# EAGLE board EC-TDS-PPM1_1 (EAGLE 7.5.0)
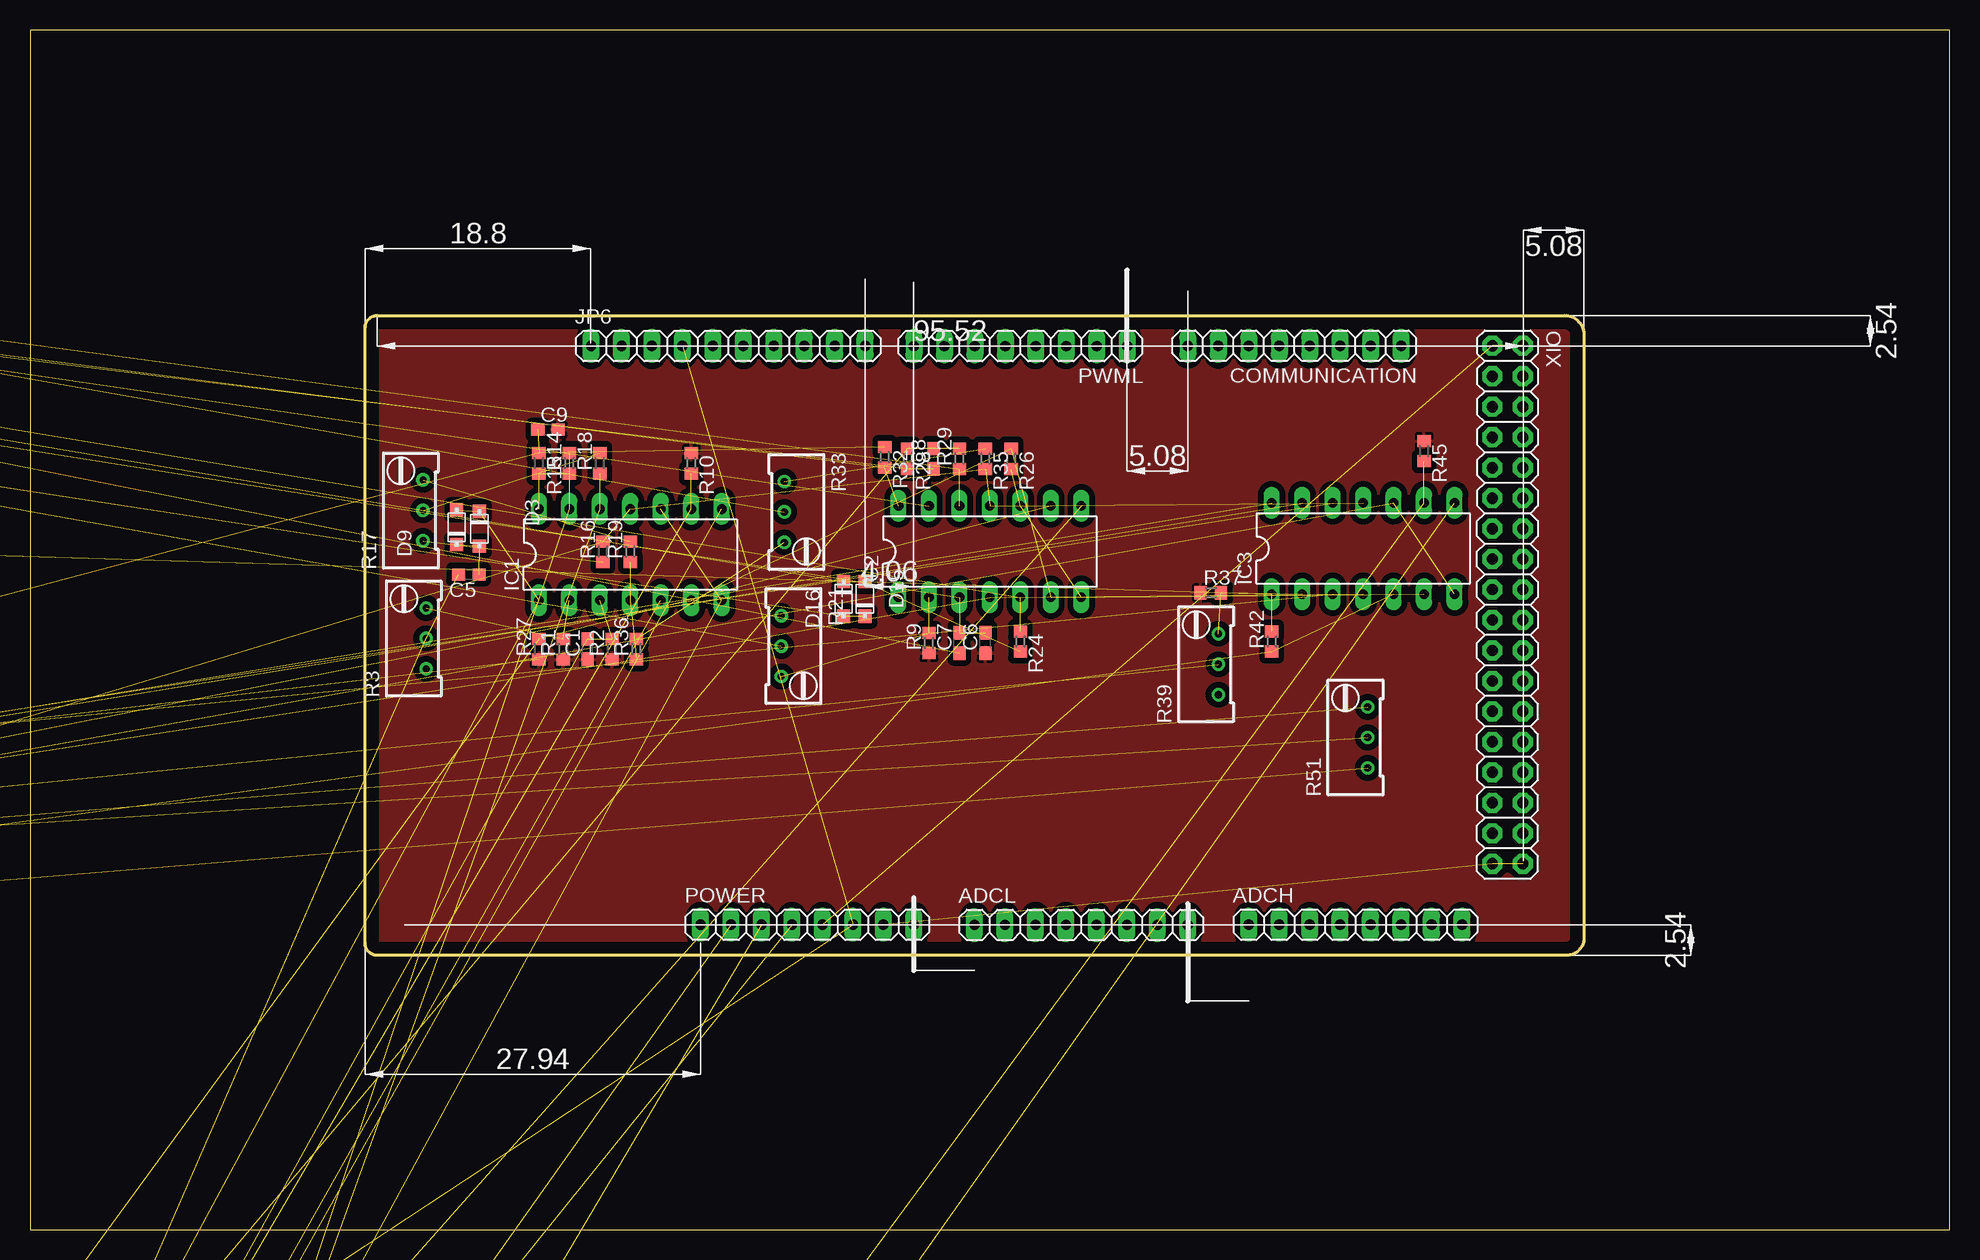
[diagram p0: board, top side]
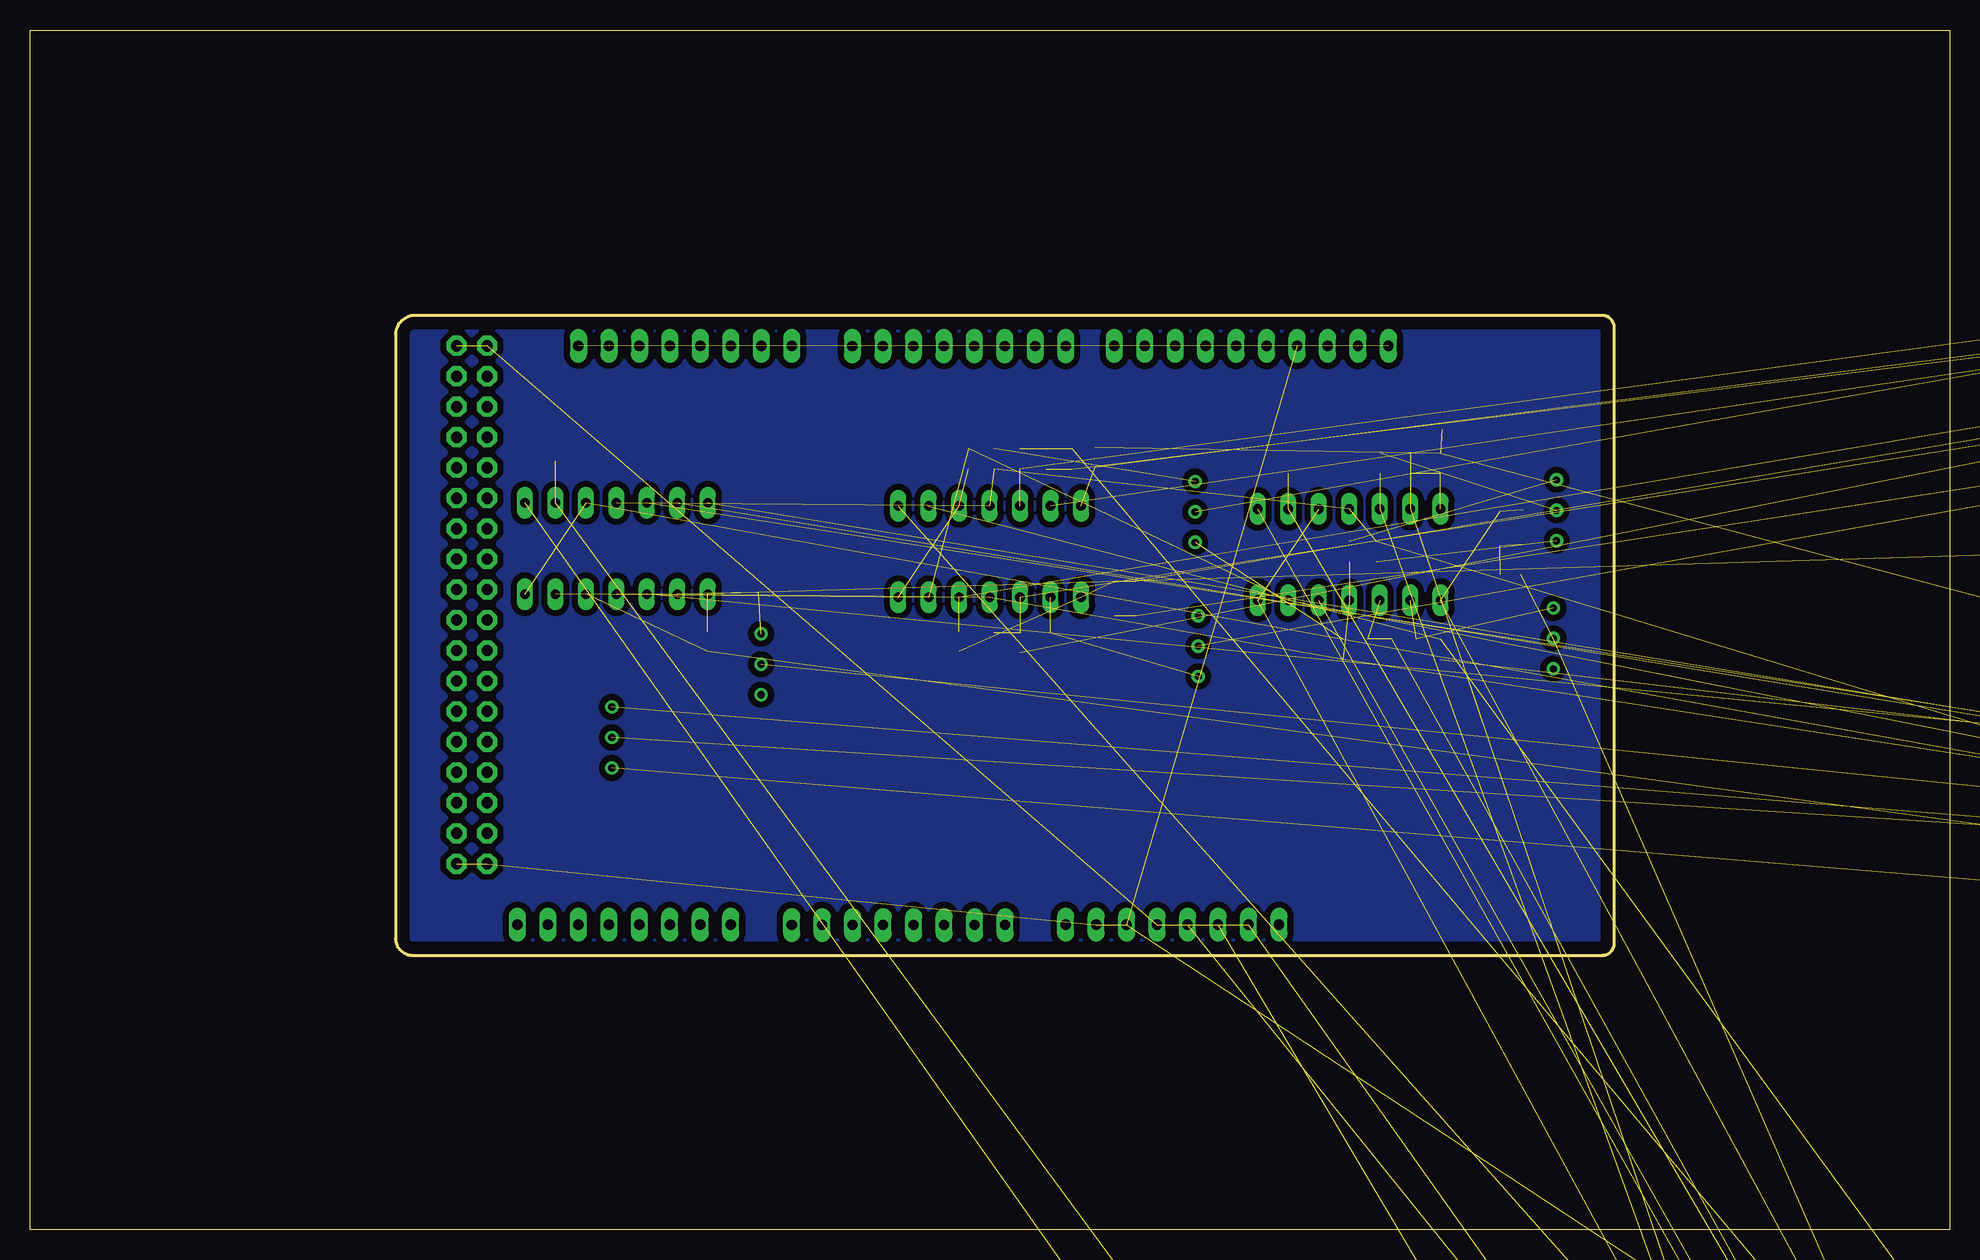
[diagram p1: board, bottom side, seen from below]

Size 160 x 100 mm. Coordinates in mm from the lower left corner, seen from the top.
Outline: 0,0 160,0 160,100 0,100 0,0
Outline: 28.94,76.19 127.92,76.19 arc-90 129.54,74.57 129.54,24.3 arc-90 128.1,22.86 28.94,22.86 arc-90 27.94,23.86 27.94,75.19 arc-90 28.94,76.19
Copper layers (1*16): Top 0.035mm / dielectric 1.5mm / Bottom 0.035mm
Design rules "default": minimum track width 10mil, minimum drill 24mil, track to track 8mil, track to pad 8mil, pad to pad 8mil, via to via 8mil, smd to smd 8mil, copper to edge 40mil, drill to drill 8mil, minimum pad ring 10mil, minimum via ring 8mil, stop-mask expansion 4mil, vias tented up to drill 0mil, thermal gap 10mil
Net classes: 0 default: width 0.203 mm, drill 0.406 mm, clearance 0.203 mm; 1 power: width 0.61 mm, drill 0.406 mm, clearance 0.203 mm; 2 gnd: width 0.305 mm, drill 0.406 mm, clearance 0.203 mm; 3 power usb: width 0.508 mm, drill 0.406 mm, clearance 0.203 mm

## Footprints (pad centres in the part's own frame; a part is rotated, then mirrored left to right if it is on the bottom)
1X08 = drill 0.85 pad 1.422 long: 1 -8.89,0; 2 -6.35,0; 3 -3.81,0; 4 -1.27,0; 5 1.27,0; 6 3.81,0; 7 6.35,0; 8 8.89,0
C0603 = smd 1.1 x 1: 1 -0.85,0; 2 0.85,0
SMC_C = smd 2.4 x 2.4: + -2.5,0; - 2.5,0
SOT123F = smd 1.1 x 1.1: A 1.45,0; C -1.45,0
2X4 = drill 1.016 pad 1.88 octagon: 1 -3.81,-1.27; 2 -3.81,1.27; 3 -1.27,-1.27; 4 -1.27,1.27; 5 1.27,-1.27; 6 1.27,1.27; 7 3.81,-1.27; 8 3.81,1.27
DIL14 = drill 0.813 long: 1 -7.62,-3.81; 2 -5.08,-3.81; 3 -2.54,-3.81; 4 0,-3.81; 5 2.54,-3.81; 6 5.08,-3.81; 7 7.62,-3.81; 8 7.62,3.81; 9 5.08,3.81; 10 2.54,3.81; 11 0,3.81; 12 -2.54,3.81; 13 -5.08,3.81; 14 -7.62,3.81
LINEAR_SOT223 = smd 1.219 x 2.235: 1 -2.311,-3.099; 2 0,-3.099; 3 2.311,-3.099 | smd 3.6 x 2.2: 4 0,3.099
DCJ0202 = drill 1 pad 2 long: 1 0,3.1; 2 4.8,0; 3 0,-3
1X02 = drill 1.016 pad 1.88: 1 0,0; 2 2.54,0
1X10 = drill 0.85 pad 1.422 long: 1 -11.43,0; 2 -8.89,0; 3 -6.35,0; 4 -3.81,0; 5 -1.27,0; 6 1.27,0; 7 3.81,0; 8 6.35,0; 9 8.89,0; 10 11.43,0
SPARKFUN_LED-0603 = smd 0.8 x 0.8: A 0,-0.75; C 0,0.75
SOT23 = smd 1 x 1.4: 1 -0.95,-1.1; 2 0.95,-1.1; 3 0,1.1
R0603 = smd 1 x 1.1: 1 -0.85,0; 2 0.85,0
RTRIM64W = drill 0.61: 1 1.27,-2.54; 2 1.27,0; 3 1.27,2.54
SPARKFUN_0603-RES = smd 1.1 x 1: 1 -0.85,0; 2 0.85,0
TS42 = smd 1.6 x 1.4: 1 -4.2,2.25; 2 4.2,2.25; 3 -4.2,-2.25; 4 4.2,-2.25; 5 -4.2,0
TACTILE-SWITCH-1101NE = smd 2.3 x 1.6: 1 -3.15,0; 2 3.15,0
2X18 = drill 0.95 pad 1.676 octagon: 1 -21.59,-1.27; 2 -21.59,1.27; 3 -19.05,-1.27; 4 -19.05,1.27; 5 -16.51,-1.27; 6 -16.51,1.27; 7 -13.97,-1.27; 8 -13.97,1.27; 9 -11.43,-1.27; 10 -11.43,1.27; 11 -8.89,-1.27; 12 -8.89,1.27; 13 -6.35,-1.27; 14 -6.35,1.27; 15 -3.81,-1.27; 16 -3.81,1.27; 17 -1.27,-1.27; 18 -1.27,1.27; 19 1.27,-1.27; 20 1.27,1.27; 21 3.81,-1.27; 22 3.81,1.27; 23 6.35,-1.27; 24 6.35,1.27; 25 8.89,-1.27; 26 8.89,1.27; 27 11.43,-1.27; 28 11.43,1.27; 29 13.97,-1.27; 30 13.97,1.27; 31 16.51,-1.27; 32 16.51,1.27; 33 19.05,-1.27; 34 19.05,1.27; 35 21.59,-1.27; 36 21.59,1.27

## Placement (x,y rotation side)
ADCH  8x1F-H8.5  [1X08]  110.48,25.41 0 top
ADCL  8x1F-H8.5  [1X08]  87.62,25.39 0 top
C1  0.015u  [C0603]  46.48,48.39 90 top
C2  0.015u  [C0603]  -7.62,-46.99 0 top  (outside the outline)
C3  0.22u  [C0603]  -17.78,-113.03 0 top  (outside the outline)
C4  0.22u  [C0603]  -72.39,194.31 0 top  (outside the outline)
C5  100n  [C0603]  36.58,54.61 180 top
C6  0.015u  [C0603]  79.63,48.9 90 top
C7  0.015u  [C0603]  77.47,48.9 90 top
C8  0.22u  [C0603]  75.31,64.26 90 top
C9  0.22u  [C0603]  43.18,66.67 0 top
C10  100n  [C0603]  -76.2,73.41 0 top  (outside the outline)
C11  0.015u  [C0603]  -92.71,34.29 0 top  (outside the outline)
C12  0.015u  [C0603]  -85.09,34.29 0 top  (outside the outline)
C13  0.22u  [C0603]  -77.47,34.29 0 top  (outside the outline)
C14  0.22u  [C0603]  -71.12,34.29 0 top  (outside the outline)
C15  100n  [C0603]  -80.01,29.21 0 top  (outside the outline)
C16  [SMC_C]  -90.17,-120.65 0 top  (outside the outline)
C33  [SMC_C]  -82.55,-120.65 0 top  (outside the outline)
COMMUNICATION  8x1F-H8.5  [1X08]  105.4,73.67 180 top
D1  PMEG2010AEH  [SOT123F]  -91.44,-193.04 0 top  (outside the outline)
D2  PMEG2010AEH  [SOT123F]  -91.44,-200.66 0 top  (outside the outline)
D3  PMEG2010AEH  [SOT123F]  37.47,58.42 270 top
D4  PMEG2010AEH  [SOT123F]  -91.44,-162.56 0 top  (outside the outline)
D5  PMEG2010AEH  [SOT123F]  -91.44,-208.28 0 top  (outside the outline)
D6  PMEG2010AEH  [SOT123F]  -91.44,-215.9 0 top  (outside the outline)
D7  PMEG2010AEH  [SOT123F]  -130.56,-342.65 0 top  (outside the outline)
D8  PMEG2010AEH  [SOT123F]  -130.56,-349.25 0 top  (outside the outline)
D9  PMEG2010AEH  [SOT123F]  35.56,58.55 90 top
D10  PMEG2010AEH  [SOT123F]  -91.44,-170.18 0 top  (outside the outline)
D11  PMEG2010AEH  [SOT123F]  -91.44,-177.8 0 top  (outside the outline)
D12  PMEG2010AEH  [SOT123F]  -91.44,-185.42 0 top  (outside the outline)
D13  PMEG2010AEH  [SOT123F]  -130.56,-369.06 0 top  (outside the outline)
D14  PMEG2010AEH  [SOT123F]  -130.56,-375.67 0 top  (outside the outline)
D15  PMEG2010AEH  [SOT123F]  67.82,52.58 270 top
D16  PMEG2010AEH  [SOT123F]  69.6,52.58 90 top
D17  PMEG2010AEH  [SOT123F]  -91.44,-223.52 0 top  (outside the outline)
D18  PMEG2010AEH  [SOT123F]  -91.44,-231.14 0 top  (outside the outline)
D19  PMEG2010AEH  [SOT123F]  -91.44,-238.76 0 top  (outside the outline)
D20  PMEG2010AEH  [SOT123F]  -91.44,-246.38 0 top  (outside the outline)
D23  PMEG2010AEH  [SOT123F]  -91.44,58.42 0 top  (outside the outline)
D24  PMEG2010AEH  [SOT123F]  -77.47,58.42 0 top  (outside the outline)
D25  PMEG2010AEH  [SOT123F]  -91.44,-22.86 0 top  (outside the outline)
D26  PMEG2010AEH  [SOT123F]  -91.44,-30.48 0 top  (outside the outline)
D27  PMEG2010AEH  [SOT123F]  -91.44,-38.1 0 top  (outside the outline)
D28  PMEG2010AEH  [SOT123F]  -91.44,-132.08 0 top  (outside the outline)
D29  PMEG2010AEH  [SOT123F]  -91.44,-139.7 0 top  (outside the outline)
D30  PMEG2010AEH  [SOT123F]  -91.44,-147.32 0 top  (outside the outline)
D31  PMEG2010AEH  [SOT123F]  -91.44,-154.94 0 top  (outside the outline)
D32  PMEG2010AEH  [SOT123F]  -130.56,-336.04 0 top  (outside the outline)
D33  PMEG2010AEH  [SOT123F]  -130.56,-355.85 0 top  (outside the outline)
ESP_ADAPTER  [2X4]  -87.63,-73.66 0 top  (outside the outline)
IC1  TL084P  [DIL14]  50.04,56.26 0 top
IC2  TL084P  [DIL14]  80.01,56.52 0 top
IC3  TL084P  [DIL14]  111.12,56.77 0 top
IC4  LINEAR_MC33269ST-3.3T3  [LINEAR_SOT223]  -34.29,-99.06 0 top  (outside the outline)
J1  DCJ0202  [DCJ0202]  -101.6,-236.22 0 top  (outside the outline)
J2  DCJ0202  [DCJ0202]  -114.3,-236.22 0 top  (outside the outline)
J3  DCJ0202  [DCJ0202]  -127,-236.22 0 top  (outside the outline)
JP1  [1X02]  -91.44,-5.08 0 top  (outside the outline)
JP2  [1X02]  -91.44,-10.16 0 top  (outside the outline)
JP3  [1X02]  -91.44,-15.24 0 top  (outside the outline)
JP6  10x1F-H8.5  [1X10]  58.19,73.66 0 top
LED  [SPARKFUN_LED-0603]  -77.47,-118.11 0 top  (outside the outline)
POWER  8x1F-H8.5  [1X08]  64.78,25.41 0 top
PWML  8x1F-H8.5  [1X08]  82.56,73.65 180 top
Q1  VSK_N_FET_TO23  [SOT23]  -130.81,-266.7 0 top  (outside the outline)
Q2  VSK_N_FET_TO23  [SOT23]  -130.81,-251.46 0 top  (outside the outline)
Q3  VSK_N_FET_TO23  [SOT23]  -130.81,-259.08 0 top  (outside the outline)
R1  [R0603]  44.45,48.39 90 top
R2  1k  [R0603]  48.51,48.39 90 top
R3  [RTRIM64W]  31.75,49.28 0 top
R4  56k  [R0603]  -7.62,-41.91 0 top  (outside the outline)
R5  1K  [R0603]  -7.62,-50.8 0 top  (outside the outline)
R6  100K  [R0603]  -7.62,-55.88 0 top  (outside the outline)
R7  1k  [R0603]  -7.62,-60.96 0 top  (outside the outline)
R8  6.8K  [R0603]  -7.62,-66.04 0 top  (outside the outline)
R9  [R0603]  74.93,48.9 90 top
R10  1.5k  [R0603]  55.12,63.88 270 top
R11  22k  [R0603]  -17.78,-118.11 0 top  (outside the outline)
R12  220K  [R0603]  -17.78,-123.19 0 top  (outside the outline)
R13  220K  [R0603]  -17.78,-128.27 0 top  (outside the outline)
R14  220K  [R0603]  44.96,63.88 90 top
R15  3.9k  [R0603]  42.42,63.88 270 top
R16  82k  [R0603]  47.75,56.52 90 top
R17  50k  [RTRIM64W]  31.5,59.94 0 top
R18  100k  [R0603]  47.5,63.88 90 top
R19  100k  [R0603]  50.04,56.52 90 top
R20  1k  [R0603]  -87.63,78.74 0 top  (outside the outline)
R21  [RTRIM64W]  63.88,48.64 180 top
R22  56k  [R0603]  -82.55,78.74 0 top  (outside the outline)
R23  1K  [R0603]  -77.47,78.74 0 top  (outside the outline)
R24  100K  [R0603]  82.55,49.02 270 top
R25  1k  [R0603]  -72.39,78.74 0 top  (outside the outline)
R26  6.8K  [R0603]  81.79,64.26 270 top
R27  1.5k  [R0603]  42.42,48.39 90 top
R28  22k  [R0603]  73.15,64.26 270 top
R29  220K  [R0603]  77.47,64.26 90 top
R30  220K  [R0603]  -92.71,83.82 0 top  (outside the outline)
R31  220K  [R0603]  -86.36,83.82 0 top  (outside the outline)
R32  3.9k  [R0603]  71.25,64.39 270 top
R33  50k  [RTRIM64W]  64.14,59.82 180 top
R34  100k  [R0603]  -73.66,83.82 0 top  (outside the outline)
R35  82k  [R0603]  79.63,64.26 270 top
R36  100k  [R0603]  50.55,48.39 90 top
R37  [R0603]  98.42,53.09 0 top
R38  1k  [R0603]  -87.63,24.13 0 top  (outside the outline)
R39  [RTRIM64W]  97.79,47.12 0 top
R40  56k  [R0603]  -82.55,24.13 0 top  (outside the outline)
R41  1K  [R0603]  -77.47,24.13 0 top  (outside the outline)
R42  100K  [R0603]  103.5,49.02 90 top
R43  1k  [R0603]  -72.39,24.13 0 top  (outside the outline)
R44  6.8K  [R0603]  -60.96,29.21 0 top  (outside the outline)
R45  1.5k  [R0603]  116.2,64.9 270 top
R46  22k  [R0603]  -67.31,24.13 0 top  (outside the outline)
R47  220K  [R0603]  -58.42,34.29 0 top  (outside the outline)
R48  220K  [R0603]  -92.71,29.21 0 top  (outside the outline)
R49  220K  [R0603]  -86.36,29.21 0 top  (outside the outline)
R50  3.9k  [R0603]  -92.71,24.13 0 top  (outside the outline)
R51  50k  [RTRIM64W]  110.24,41.02 0 top
R52  100k  [R0603]  -73.66,29.21 0 top  (outside the outline)
R53  82k  [R0603]  -62.23,24.13 0 top  (outside the outline)
R54  100k  [R0603]  -67.31,29.21 0 top  (outside the outline)
R55  1K  [R0603]  -92.71,-41.91 0 top  (outside the outline)
R56  1K  [R0603]  -92.71,-46.99 0 top  (outside the outline)
R57  1K  [R0603]  -92.71,-52.07 0 top  (outside the outline)
R58  1K  [R0603]  -92.71,-57.15 0 top  (outside the outline)
R59  1K  [R0603]  -92.71,-62.23 0 top  (outside the outline)
R60  1K  [R0603]  -92.71,-66.04 0 top  (outside the outline)
R61  100k  [R0603]  -92.71,-78.74 0 top  (outside the outline)
R62  100k  [R0603]  -92.71,-83.82 0 top  (outside the outline)
R63  [SPARKFUN_0603-RES]  -92.71,-124.46 0 top  (outside the outline)
RESET  TS42031-160R-TR-7260  [TS42]  -128.66,-285.92 0 top  (outside the outline)
S1  SWITCH-MOMENTARY-2SMD-1101NE  [TACTILE-SWITCH-1101NE]  -88.9,-97.79 0 top  (outside the outline)
S2  SWITCH-MOMENTARY-2SMD-1101NE  [TACTILE-SWITCH-1101NE]  -88.9,-104.14 0 top  (outside the outline)
XIO  18x2F-H8.5  [2X18]  123.16,52.08 270 top

## Library data of the parts
ADCH ADCL COMMUNICATION JP6 POWER PWML RESET XIO = SmartPrj
C1-C15 R1-R62 = resistor
C16 C33 = rcl
D1-D20 D23-D33 = Enleka_Diode; PARTNO: PMEG2010AEH,115
ESP_ADAPTER JP1-JP3 = SparkFun-Connectors
IC1-IC3 = linear
IC4 = Robotech_Other
J1-J3 = con-jack; OC_FARNELL: unknown; OC_NEWARK: unknown
LED = Robotech RLC of Chung
Q1-Q3 = transistor-fet
R63 = Robotech_RCL
S1 S2 = SparkFun-Electromechanical; PROD_ID: SWCH-00815

## Nets
5-GND: RESET.5
+3V3: C33.+ ESP_ADAPTER.2 ESP_ADAPTER.6 IC4.2 IC4.4 LED.A POWER.4
+5V: C16.+ IC4.3 POWER.2 POWER.5 XIO.1 XIO.2
+6V: D25.C D26.C D27.C JP1.1 JP2.1 JP3.1
ADC0: ADCL.1
ADC1: ADCL.2
ADC2: ADCL.3
ADC3: ADCL.4
ADC4: ADCL.5
ADC5: ADCL.6
ADC6: ADCL.7
ADC7: ADCL.8
ADC8: ADCH.1
ADC9: ADCH.2
ADC10: ADCH.3
ADC11: ADCH.4
ADC12: ADCH.5
ADC13: ADCH.6
ADC14: ADCH.7
ADC15: ADCH.8
AIN1: IC1.6 IC2.6 IC3.6 R8.1 R26.1 R44.1
ANALOG_OUT1: C4.1 C9.1 C14.1 D7.A D8.C D13.C D14.A D32.C D33.A R15.1 R32.1 R50.1
AREF: JP6.3
GND: ESP_ADAPTER.7 JP6.4 POWER.6 POWER.7 XIO.35 XIO.36
GND1: C1.1 C4.2 C6.1 C9.2 C11.1 C14.2 C16.- C33.- D8.A D13.A D32.A IC4.1 Q1.2 Q2.2 Q3.2 R1.1 R2.1 R7.2 R9.1 R10.1 R20.1 R25.2 R27.1 R37.1 R38.1 R43.2 R45.1 R58.2 R59.2 R60.2 R63.2 RESET.1 RESET.2 S1.1 S2.1
GPIO0: ESP_ADAPTER.3 R61.2
GPIO2: ESP_ADAPTER.5 R62.2
N$1: IC1.2 R1.2 R3.3
N$2: C2.1 R5.2
N$3: C1.2 C2.2 IC1.3 R2.2
N$4: IC1.5 R6.1 R7.1
N$5: C5.2 R3.2 R4.2
N$6: R16.1 R17.1
N$7: D3.C D9.A IC1.1 R4.1 R5.1 R6.2
N$8: C5.1 D3.A D9.C
N$9: IC1.7 IC1.10 R8.2
N$10: R17.3 R19.2
N$11: IC1.13 R13.1 R14.2
N$12: C3.1 D1.A D5.A R11.2 R13.2
N$13: D1.C D2.A IC1.9 R10.2
N$14: C3.2 D2.C D6.C R11.1 R12.2
N$15: D5.C D6.A IC1.8
N$16: IC1.12 R12.1 R18.1
N$17: IC1.14 R14.1 R15.2
N$18: R17.2 R18.2
N$19: IC2.2 R9.2 R21.3
N$20: C6.2 C7.2 IC2.3 R20.2
N$21: C10.2 R21.2 R22.2
N$22: D15.C D16.A IC2.1 R22.1 R23.1 R24.2
N$23: C7.1 R23.2
N$24: IC2.5 R24.1 R25.1
N$25: IC2.7 IC2.10 R26.2
N$26: C8.1 D30.A D31.A R28.2 R30.2
N$27: D28.A D30.C IC2.9 R27.2
N$28: C8.2 D28.C D29.C R28.1 R29.2
N$29: D29.A D31.C IC2.8
N$30: IC2.13 R30.1 R31.2
N$31: IC2.12 R29.1 R34.1
N$32: IC2.14 R31.1 R32.2
N$33: C10.1 D15.A D16.C
N$34: R33.1 R35.1
N$35: R33.3 R36.2
N$36: R33.2 R34.2
N$37: IC3.2 R37.2 R39.3
N$38: C11.2 C12.2 IC3.3 R38.2
N$39: C15.2 R39.2 R40.2
N$40: D23.C D24.A IC3.1 R40.1 R41.1 R42.2
N$41: C12.1 R41.2
N$42: IC3.5 R42.1 R43.1
N$43: IC3.7 IC3.10 R44.2
N$44: C13.1 D17.A D19.A R46.2 R48.2
N$45: D17.C D18.A IC3.9 R45.2
N$46: C13.2 D18.C D20.C R46.1 R47.2
N$47: D19.C D20.A IC3.8
N$48: IC3.13 R48.1 R49.2
N$49: IC3.12 R47.1 R52.1
N$50: IC3.14 R49.1 R50.2
N$51: C15.1 D23.A D24.C
N$52: R51.1 R53.1
N$53: R51.3 R54.2
N$54: R51.2 R52.2
N$55: D26.A JP2.2 Q3.3
N$56: D27.A JP3.2 Q2.3
N$57: D25.A JP1.2 Q1.3
N$58: Q2.1 R57.1 R58.1
N$59: Q3.1 R56.1 R59.1
N$61: Q1.1 R55.1 R60.1
N$62: R61.1 S1.2
N$63: R62.1 S2.2
N$64: LED.C R63.1
PA0: XIO.3
PA1: XIO.4
PA2: XIO.5
PA3: XIO.6
PA4: XIO.7
PA5: XIO.8
PA6: XIO.9
PA7: XIO.10
PB0: XIO.34
PB1: XIO.33
PB2: XIO.32
PB3: XIO.31
PB4: JP6.8
PB5: JP6.7
PB6: JP6.6
PB7: JP6.5
PC0: XIO.18
PC1: XIO.17
PC2: XIO.16
PC3: XIO.15
PC4: XIO.14
PC5: XIO.13
PC6: XIO.12
PC7: XIO.11
PD7: XIO.19
PE0: PWML.1
PE1: PWML.2
PE3: PWML.6
PE4: PWML.3
PE5: PWML.4
PG0: XIO.22
PG1: XIO.21
PG2: XIO.20
PG5: PWML.5
PH3: PWML.7
PH4: PWML.8
PH5: JP6.10
PH6: JP6.9
PL0: XIO.30
PL1: XIO.29
PL2: XIO.28
PL3: XIO.27
PL4: XIO.26
PL5: XIO.25
PL6: XIO.24
PL7: XIO.23
PWM1: R55.2
PWM2: R56.2
PWM3: R57.2
RESET: POWER.3 RESET.3 RESET.4
RST: ESP_ADAPTER.4
RX: ESP_ADAPTER.1
RXD1: COMMUNICATION.3
RXD2: COMMUNICATION.5
RXD3: COMMUNICATION.7
SCL: COMMUNICATION.1 JP6.1
SDA: COMMUNICATION.2 JP6.2
TX: ESP_ADAPTER.8
TXD1: COMMUNICATION.4
TXD2: COMMUNICATION.6
TXD3: COMMUNICATION.8
V+: IC1.4 IC2.4 IC3.4 R19.1 R36.1 R54.1
V-: IC1.11 IC2.11 IC3.11 R16.2 R35.2 R53.2
VCC: D7.C D14.C D33.C
VIN [power]: POWER.8

## Tracks (layer width: path | path; a pad name or v marks a point on that pad's centre or on a via)
+3V3  (6 unrouted)
+5V  (5 unrouted)
+6V  (5 unrouted)
AIN1  (5 unrouted)
ANALOG_OUT1  (11 unrouted)
GND  (5 unrouted)
GND1  (25 unrouted)
  pour Bottom (isolate 0.508): 27.94,76.2 27.94,22.86 129.54,22.86 129.54,76.2
  pour Top (isolate 0.508): 27.94,76.2 27.94,22.86 129.54,22.86 129.54,76.2
GPIO0  (1 unrouted)
GPIO2  (1 unrouted)
N$1  (2 unrouted)
N$2  (1 unrouted)
N$3  (3 unrouted)
N$4  (2 unrouted)
N$5  (2 unrouted)
N$6  (1 unrouted)
N$7  (5 unrouted)
N$8  (2 unrouted)
N$9  (2 unrouted)
N$10  (1 unrouted)
N$11  (2 unrouted)
N$12  (4 unrouted)
N$13  (3 unrouted)
N$14  (4 unrouted)
N$15  (2 unrouted)
N$16  (2 unrouted)
N$17  (2 unrouted)
N$18  (1 unrouted)
N$19  (2 unrouted)
N$20  (3 unrouted)
N$21  (2 unrouted)
N$22  (5 unrouted)
N$23  (1 unrouted)
N$24  (2 unrouted)
N$25  (2 unrouted)
N$26  (4 unrouted)
N$27  (3 unrouted)
N$28  (4 unrouted)
N$29  (2 unrouted)
N$30  (2 unrouted)
N$31  (2 unrouted)
N$32  (2 unrouted)
N$33  (2 unrouted)
N$34  (1 unrouted)
N$35  (1 unrouted)
N$36  (1 unrouted)
N$37  (2 unrouted)
N$38  (3 unrouted)
N$39  (2 unrouted)
N$40  (5 unrouted)
N$41  (1 unrouted)
N$42  (2 unrouted)
N$43  (2 unrouted)
N$44  (4 unrouted)
N$45  (3 unrouted)
N$46  (4 unrouted)
N$47  (2 unrouted)
N$48  (2 unrouted)
N$49  (2 unrouted)
N$50  (2 unrouted)
N$51  (2 unrouted)
N$52  (1 unrouted)
N$53  (1 unrouted)
N$54  (1 unrouted)
N$55  (2 unrouted)
N$56  (2 unrouted)
N$57  (2 unrouted)
N$58  (2 unrouted)
N$59  (2 unrouted)
N$61  (2 unrouted)
N$62  (1 unrouted)
N$63  (1 unrouted)
N$64  (1 unrouted)
RESET  (2 unrouted)
SCL  (1 unrouted)
SDA  (1 unrouted)
V+  (5 unrouted)
V-  (5 unrouted)
VCC  (2 unrouted)